# EAGLE board piezo-preamp-tickler_V3-2_single-supply-OPA1642 (EAGLE 8.5.0)

Size 100 x 66 mm. Coordinates in mm from the lower left corner, seen from the top.
Outline: 0,0 100,0 100,66 0,66 0,0
Copper layers (1*16): Top 0.0356mm / dielectric 1.5011mm / Bottom 0.0356mm
Design rules "oshpark-2layer *": minimum track width 16mil, minimum drill 13mil, track to track 16mil, track to pad 16mil, pad to pad 16mil, via to via 16mil, smd to smd 16mil, copper to edge 15mil, drill to drill 6mil, minimum pad ring 7mil, minimum via ring 7mil, stop-mask expansion 2.5mil, vias tented up to drill 0mil, thermal gap 10mil
Net classes: 0 default: width 0.152 mm, clearance 0.2 mm
Holes 4 mm at 5,5 95,5 5,61 95,60

## Footprints (pad centres in the part's own frame; a part is rotated, then mirrored left to right if it is on the bottom)
C1206 = smd 1.6 x 1.8: 1 -1.4,0; 2 1.4,0
EIA7343-31/D-R = smd 2.55 x 2.7: + 3.175,0; - -3.175,0
C0805K = smd 1.1 x 1.4: 1 -1,0; 2 1,0
JST-PH-2-THM = drill 0.8 pad 1.422: 1 1,0; 2 -1,0
SOT23 = smd 1 x 1.4: 1 -0.95,-1.1; 2 0.95,-1.1; 3 0,1.1
SOD-123 = smd 1.2 x 0.7: A 1.85,0; C -1.85,0
SMA-DIODE = smd 1.27 x 1.47: A -2.15,0; C 2.15,0
TRRS_SJ-43514-SMT-TR = smd 1.524 x 3.175: EARTH -2.114,-5.271; RING1 2.644,2.759; RING2 0.66,-5.271; TIP 9.948,-5.271 | hole 1.778: 1.6,-1.15; 8.6,-1.15
SO08 = smd 0.6 x 2.2: 1 -1.905,-2.6; 2 -0.635,-2.6; 3 0.635,-2.6; 4 1.905,-2.6; 5 1.905,2.6; 6 0.635,2.6; 7 -0.635,2.6; 8 -1.905,2.6
1X02_LOCK = drill 1.016 pad 1.88: 1 -0.178,0; 2 2.718,0
USB-B-MICRO-SMD_RED_PASTE = smd 1.45 x 0.4: D+ 2.725,0; D- 2.725,0.65; GND 2.725,-1.3; ID 2.725,-0.65; VBUS 2.725,1.3 | smd 1.5 x 1.8: SHIELD1 0,3.685; SHIELD2 0,-3.685 | smd 1.5 x 2.5: SHIELD3 0,0 | hole 0.85: 2.2,1.9; 2.2,-1.9
1X02 = drill 1.016 pad 1.88: 1 0,0; 2 2.54,0
L3225P = smd 1.8 x 2: 1 -1.4,0; 2 1.4,0
CR54 = smd 4.2 x 1.4: P$1 0,1.85; P$2 0,-1.85
LED3MM = drill 0.813 octagon: A -1.27,0; K 1.27,0
TRS_SJ-3524-SMT = smd 2.5 x 2.2: 1 3.85,-4.6; 3 -3.85,-2.7 | smd 2.5 x 2.8: 2 3.85,4.7 | smd 2.8 x 2.5: 4 -0.75,8.85 | hole 1.7: 0,-3.5; 0,3.5
SOT23-6 = smd 0.55 x 1.2: 1 -0.95,-1.3; 2 0,-1.3; 3 0.95,-1.3; 4 0.95,1.3; 5 0,1.3; 6 -0.95,1.3
WSON-6 = smd 0.3 x 0.7: 1 -0.5,-0.55; 2 0,-0.55; 3 0.5,-0.55; 4 0.5,0.55; 5 0,0.55; 6 -0.5,0.55
SOT-563 = smd 0.3 x 0.45: 1 -0.5,-0.675; 2 0,-0.675; 3 0.5,-0.675; 4 0.5,0.675; 5 0,0.675; 6 -0.5,0.675
SOT23-5 = smd 0.55 x 1.2: 1 -0.95,-1.3; 2 0,-1.3; 3 0.95,-1.3; 4 0.95,1.3; 5 -0.95,1.3
R0603 = smd 1 x 1.1: 1 -0.85,0; 2 0.85,0
R0805 = smd 1.3 x 1.5: 1 -0.95,0; 2 0.95,0
TRIMPOT-MULTI = drill 0.8 octagon: P$1 -2.54,-4.699; P$3 -2.54,-2.159; P$4 -2.54,-2.159; P$6 -2.54,0.381; P$9 -2.54,4.191; P$10 0,-4.699; P$12 0,-2.159; P$13 0,-2.159; P$15 0,0.381; P$16 0,2.921; P$18 0,4.191; P$20 2.54,-4.699; P$21 2.54,-2.159; P$22 2.54,-2.159; P$24 2.54,0.381; P$27 2.54,4.191
SWITCH_SPDT_CL-SB-12B = smd 1.2 x 1.4: P$1 -2.5,-2.2; P$2 0,2.2; P$3 2.5,-2.2 | hole 0.9: -3.4,0; 3.4,0
SWITCH_SPDT_CSS-1210B = smd 1 x 2.5: P$1 -3,3.75; P$2 -1,3.75; P$3 1,3.75 | drill 0.8: P$4 -3.15,0; P$5 3.15,0
SWITCH_DPDT_CL-SB-22B = smd 1.2 x 1.4: 1 -2.5,-2.2; 2 0.05,-2.17; 3 2.5,-2.2; 4 -2.63,2.2; 5 0,2.2; 6 2.51,2.2 | hole 0.9: -3.4,0; 3.4,0

## Placement (x,y rotation side)
C2  10uF  [C1206]  50,55 270 top
C3  100uF  [EIA7343-31/D-R]  42,26 0 top
C4  0.1uF  [C0805K]  65,55 270 top
C5  0.1uF  [C0805K]  14,56 270 top
C6  10uF  [C1206]  50,39 0 top
C8  0.1uF  [C0805K]  119.03,17 0 top  (outside the outline)
C15  10uF  [C0805K]  127.02,24.02 0 top  (outside the outline)
C16  10uF  [C0805K]  138,47.01 0 top  (outside the outline)
C17  0.1uF  [C0805K]  147,53.02 0 top  (outside the outline)
C18  10uF  [C0805K]  119,24 0 top  (outside the outline)
C19  22pF  [C0805K]  147,22.04 0 top  (outside the outline)
C20  10uF  [C0805K]  119.02,9.98 0 top  (outside the outline)
C21  0.1uF  [C0805K]  119,32.01 0 top  (outside the outline)
CN1  [JST-PH-2-THM]  3,27 90 top
D1  BAT54S  [SOT23]  -32,-28 0 top  (outside the outline)
D4  1N4148  [SOD-123]  137,15.99 0 top  (outside the outline)
D5  10BQ015  [SMA-DIODE]  146.99,16 180 top  (outside the outline)
HEADSET  SJ-43514  [TRRS_SJ-43514-SMT-TR]  96,38 180 top
IC1  OPA1642  [SO08]  38.09,35.37 0 top
J2  [1X02_LOCK]  -25,-42 0 top  (outside the outline)
J4  Battery  [1X02_LOCK]  115.78,53.95 90 top  (outside the outline)
J5  [USB-B-MICRO-SMD_RED_PASTE]  115.02,43.02 0 top  (outside the outline)
J6  12V  [1X02]  136.28,9.89 0 top  (outside the outline)
J7  12V  [1X02]  144.9,9.89 0 top  (outside the outline)
L1  100uH  [L3225P]  -4,-6 0 top  (outside the outline)
L3  2.7 uH  [CR54]  137,31 0 top  (outside the outline)
LED2  [LED3MM]  -27,-58 0 top  (outside the outline)
LED4  [LED3MM]  144.29,58.98 270 top  (outside the outline)
LED5  [LED3MM]  123,59.1 270 top  (outside the outline)
MIXER-OUT  TRS-1/8"-3.5MM  [TRS_SJ-3524-SMT]  -26,-14 0 top  (outside the outline)
PHONE  SJ-43514  [TRRS_SJ-43514-SMT-TR]  96,14 180 top
Q1  BQ21040  [SOT23-6]  129.97,50.27 0 top  (outside the outline)
Q2  MMBFJ201  [SOT23]  75.05,33.17 0 top
Q7  BQ297X  [WSON-6]  137.99,39.99 0 top  (outside the outline)
Q8  DMN2400  [SOT-563]  147,39.99 0 top  (outside the outline)
Q9  SC4503  [SOT23-5]  137.34,22.41 180 top  (outside the outline)
R1  100K  [R0603]  13,28 0 top
R2  10M  [R0603]  21,13 90 top
R3  1.2K  [R0603]  -18,-54 0 top  (outside the outline)
R4  390  [R0805]  122,47.01 0 top  (outside the outline)
R5  10  [R0805]  127,16.98 0 top  (outside the outline)
R6  100K  [R0603]  35,57 90 top
R7  100K  [R0603]  35,50 90 top
R8  220  [R0603]  51,27 0 top
R9  220  [R0603]  80,58 0 top
R10  1K  [R0603]  66,34 180 top
R11  1M  [R0603]  61,20 90 top
R12  1.2K  [R0603]  73,23 90 top
R13  2.2K  [R0603]  85,27 90 top
R15  20K  [TRIMPOT-MULTI]  62,9 0 top
R16  866k  [R0805]  146.99,28 180 top  (outside the outline)
R17  100k  [R0805]  146.97,33.98 0 top  (outside the outline)
R26  15k  [R0805]  127,32 0 top  (outside the outline)
R27  1k  [R0805]  122,51.99 0 top  (outside the outline)
R28  10k  [R0805]  138,53.02 0 top  (outside the outline)
R29  10k  [R0805]  127.42,39.65 0 top  (outside the outline)
R30  330  [R0805]  147,46.99 0 top  (outside the outline)
SW1  SPDT  [SWITCH_SPDT_CL-SB-12B]  132.62,59.1 180 top  (outside the outline)
SW1-INPUT  SPDTCSS-1210B  [SWITCH_SPDT_CSS-1210B]  2,-18 0 top  (outside the outline)
SW1-OUTPUT  SWITCH_DPDT  [SWITCH_DPDT_CL-SB-22B]  -12,-19 0 top  (outside the outline)

## Library data of the parts
C2 = rcl
C3 = microbuilder
C4-C6 C8 C15-C21 CN1 = adafruit
D1 = diode
D4 = adafruit; DIGIKEY: 1N4148WTPMSCT-ND
D5 = SparkFun
HEADSET MIXER-OUT PHONE Q1 Q7-Q9 R1-R13 R15-R17 R26-R30 SW1 SW1-INPUT SW1-OUTPUT = CMU-ArtFab
IC1 = linear
J2 = SparkFun-Connectors
J4 = SparkFun-Connectors; G: -; V: +
J5 = SparkFun-Connectors; PROD_ID: CONN-11752
J6 J7 = SparkFun-Connectors; GND: GND
L1 = rcl; SPICEPREFIX: L
L3 = SparkFun-Coils; PROD_ID: NDUC-11157
LED2 LED4 LED5 = led
Q2 = transistor-fet

## Nets
+12V: C19.1 C20.1 D4.A D5.C J2.1 L1.1 R3.2 R16.2
GATE2: Q2.3 R10.1 R11.2
GND: C2.2 C4.2 C5.2 C8.2 C15.2 C18.2 C20.2 C21.2 CN1.1 D1.1 HEADSET.RING2 IC1.4 J2.2 J6.1 J7.1 LED2.K LED4.K MIXER-OUT.1 PHONE.RING2 Q7.6 Q8.1 Q9.2 R7.1 R11.1 R12.1 R13.1 R17.1
GND2: C16.2 C17.2 J5.GND Q1.5 Q7.4 Q8.3 R28.1 R29.1 SW1.P$2
N$1: C3.+ IC1.1 IC1.2
N$3: R10.2 SW1-OUTPUT.4
N$4: LED2.A R3.1
N$5: D1.3 IC1.3 R1.2 R2.2
N$6: Q2.2 R12.2
N$7: HEADSET.EARTH SW1-INPUT.P$3
N$8: SW1-INPUT.P$1 SW1-OUTPUT.1
N$9: MIXER-OUT.2 MIXER-OUT.3 MIXER-OUT.4 SW1-OUTPUT.3
N$13: LED4.A R4.1
N$14: J4.2 SW1.P$1
N$15: D5.A L3.P$2 Q9.1
N$16: IC1.5 R9.2
N$17: C21.1 Q9.4 R26.1
N$19: C19.2 Q9.3 R16.1 R17.2
N$20: LED5.K R27.1
N$22: IC1.6 R8.2 R15.P$1 R15.P$3 R15.P$4 R15.P$6 R15.P$9
N$23: C6.2 SW1-OUTPUT.5
N$24: CN1.2 R1.1
N$25: Q1.3 R27.2
N$26: Q1.1 R28.2
N$27: Q1.4 R29.2
N$28: C17.1 Q7.5 R30.2
N$31: C6.1 IC1.7 R15.P$10 R15.P$12 R15.P$13 R15.P$15 R15.P$16 R15.P$18
N$32: C5.1 D1.2 IC1.8 L1.2 R6.2
N$35: C2.1 C4.1 R2.1 R6.1 R7.2 R9.1
N$36: Q8.4 Q8.6
N$42: Q7.2 Q8.5
N$44: HEADSET.TIP PHONE.TIP
N$45: HEADSET.RING1 PHONE.RING1
N$46: PHONE.EARTH SW1-INPUT.P$2
N$47: Q7.3 Q8.2
N$48: C15.1 D4.C R5.2
N$49: C8.1 J6.2 J7.2 R5.1
N$52: C3.- R8.1
NAME: Q2.1 R13.2 SW1-OUTPUT.2
V+: C16.1 J5.VBUS LED5.A Q1.6
VBAT: C18.1 J4.1 L3.P$1 Q1.2 Q9.5 R4.2 R26.2 R30.1

## Tracks (layer width: path | path; a pad name or v marks a point on that pad's centre or on a via)
+12V  (7 unrouted)
GATE2  (2 unrouted)
GND  (26 unrouted)
GND2  (8 unrouted)
N$1  (2 unrouted)
N$3  (1 unrouted)
N$4  (1 unrouted)
N$5  (3 unrouted)
N$6  (1 unrouted)
N$7  (1 unrouted)
N$8  (1 unrouted)
N$9  (3 unrouted)
N$13  (1 unrouted)
N$14  (1 unrouted)
N$15  (2 unrouted)
N$16  (1 unrouted)
N$17  (2 unrouted)
N$19  (3 unrouted)
N$20  (1 unrouted)
N$22  (5 unrouted)
N$23  (1 unrouted)
N$24  (1 unrouted)
N$25  (1 unrouted)
N$26  (1 unrouted)
N$27  (1 unrouted)
N$28  (2 unrouted)
N$31  (6 unrouted)
N$32  (4 unrouted)
N$35  (5 unrouted)
N$36  (1 unrouted)
N$42  (1 unrouted)
N$44  (1 unrouted)
N$45  (1 unrouted)
N$46  (1 unrouted)
N$47  (1 unrouted)
N$48  (2 unrouted)
N$49  (3 unrouted)
N$52  (1 unrouted)
NAME  (2 unrouted)
V+  (3 unrouted)
VBAT  (7 unrouted)

## Text on the board
tNames: Ali Momeni 2017 | Tickler Preamp v.3-single-OPA1612